# Altium PCB 环境检测.PcbDoc
Units mm, origin at the board's own origin, x right, y up, seen from the top; angles counter-clockwise.
Board outline 66.84 x 74.91 mm, 2 copper layers (Top Layer, Bottom Layer); 11 components, 42 nets, 80 pads, 43 vias.
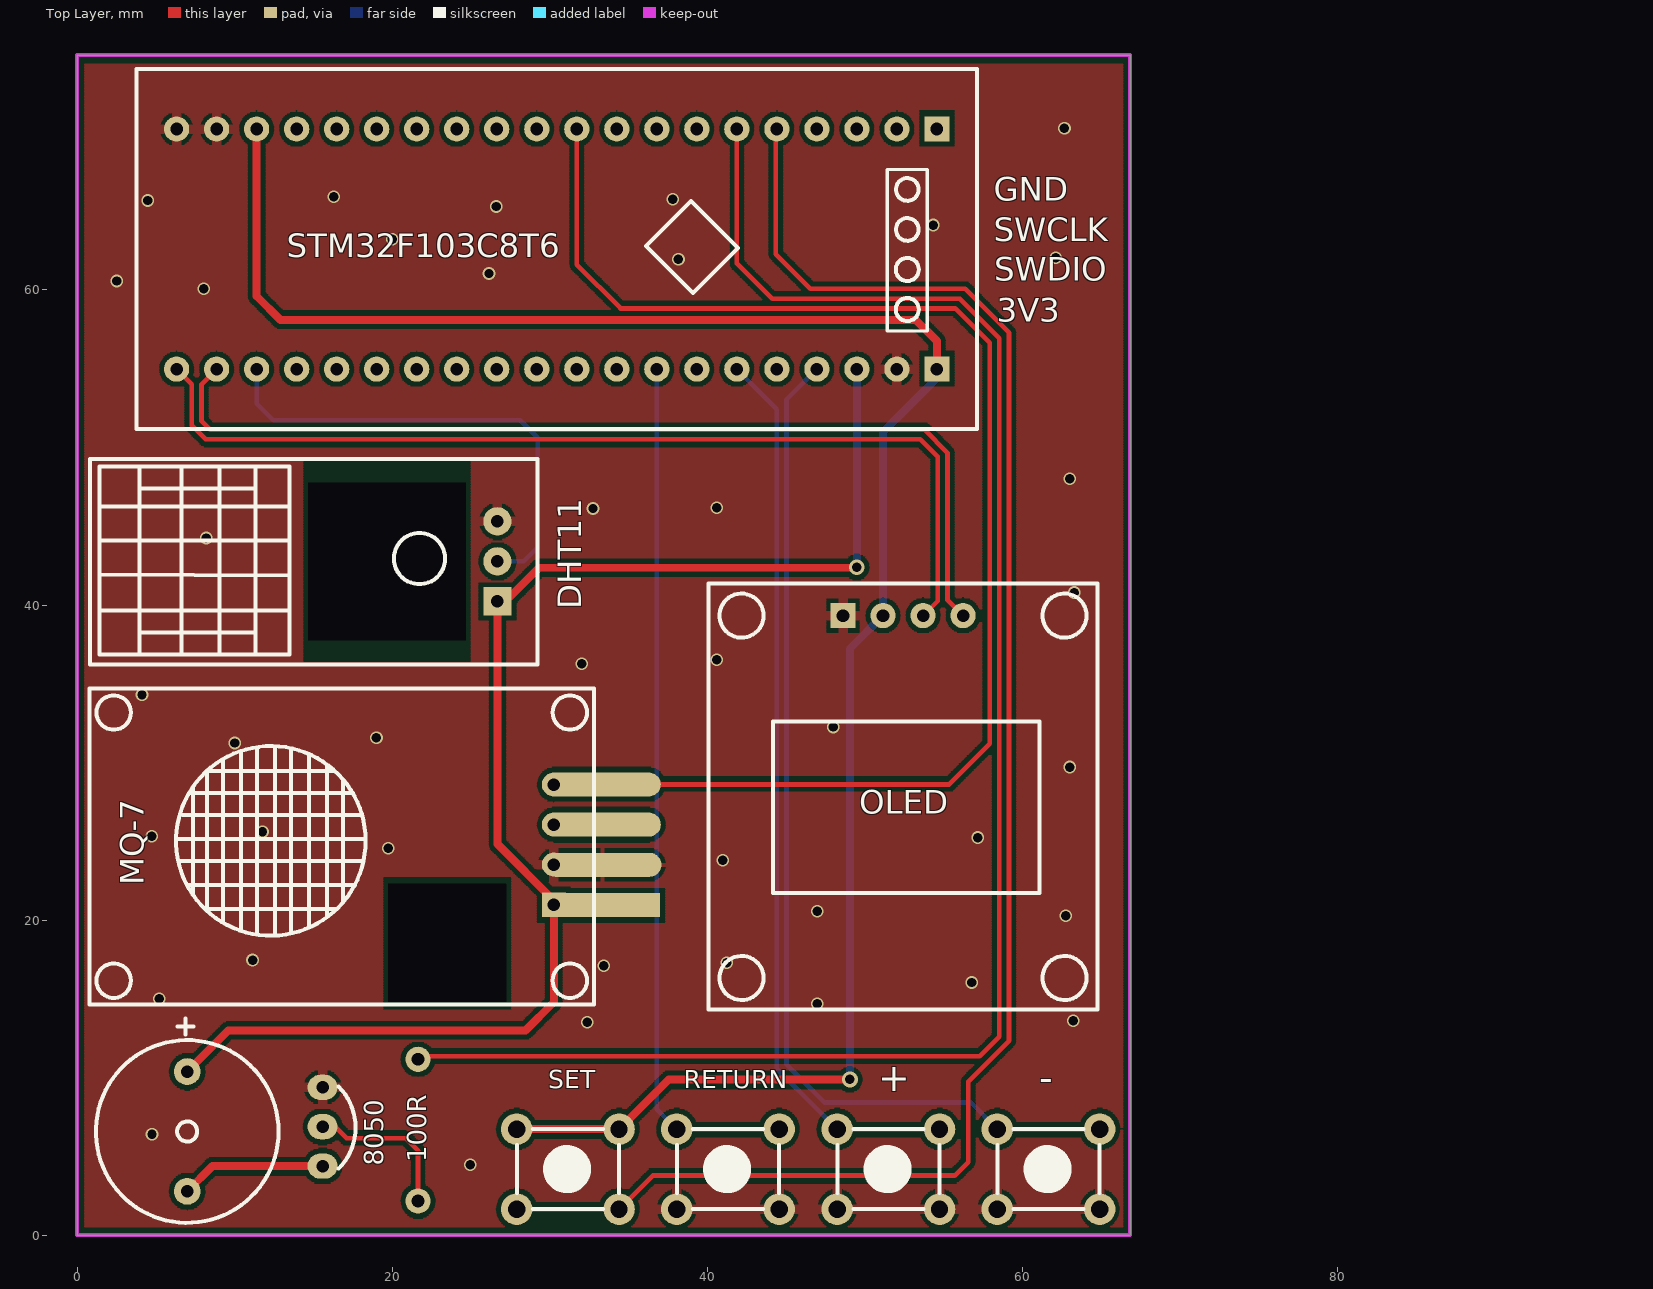
[diagram p0: Top Layer view]
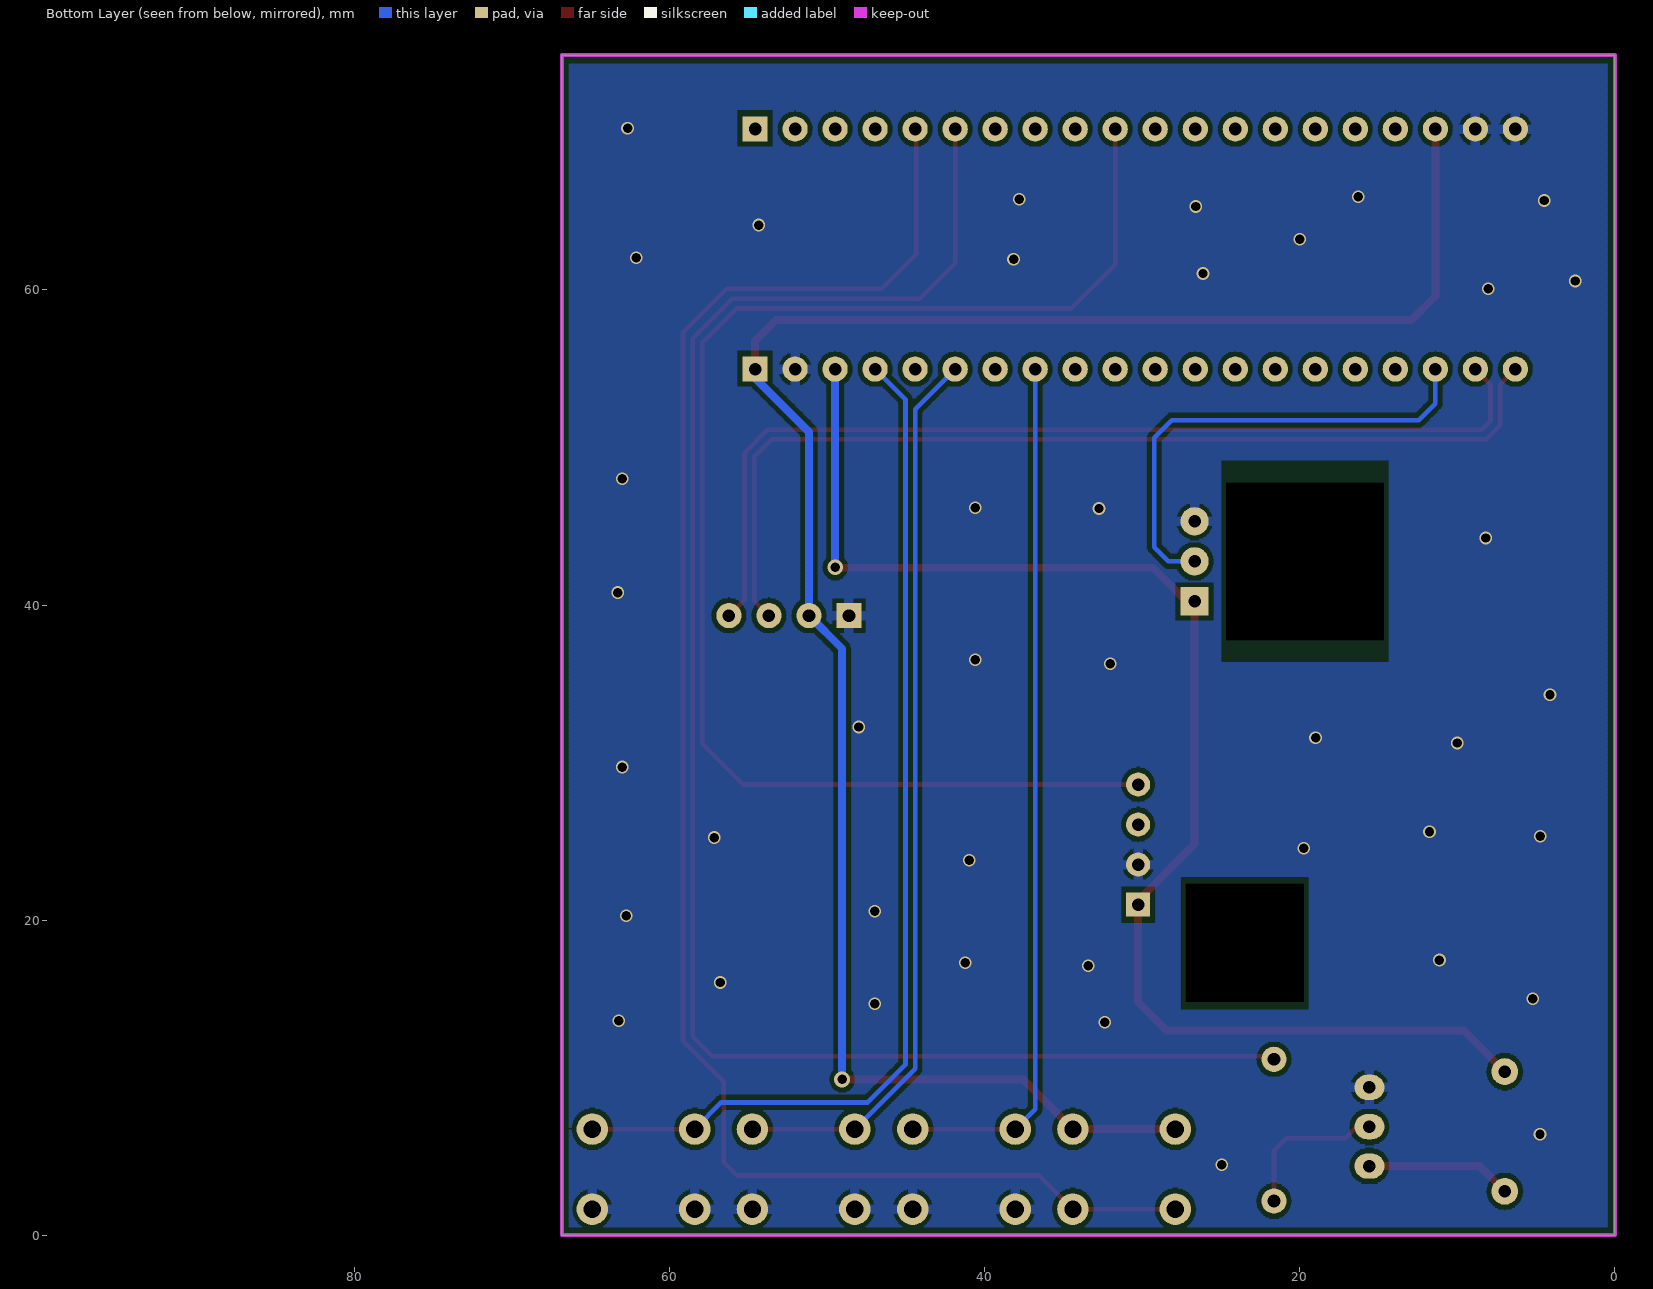
[diagram p1: Bottom Layer view, seen from below]

## Layer stack, top to bottom
Top Solder: solder mask 0.0102, Solder Resist, Dk 3.5
Top Layer: signal copper 0.0356
Dielectric1: dielectric 0.32, FR-4, Dk 4.8
Bottom Layer: signal copper 0.0356
Bottom Solder: solder mask 0.0102, Solder Resist, Dk 3.5

## Board outline
0,0 0,74.909 66.835,74.909 66.835,0

## Design rules (kind name [scope] priority, off if disabled: settings)
Clearance [All] p1: gap=0.3 ignorepadtopadclearanceinfootprint=FALSE
ComponentClearance [All] p1: gap=0 collisioncheckmode=3 verticalgap=0 showdistances=FALSE
DiffPairsRouting [All] p1: maxlimit=0.254 minlimit=0.25 mostfreqgap=0.254 toplayer_minwidth=0.3 toplayer_maxwidth=0.381 toplayer_prefwidth=0.3 bottomlayer_minwidth=0.3 bottomlayer_maxwidth=0.381 bottomlayer_prefwidth=0.3 maxuncoupledlength=12.7
FabricationTestpoint [(IsPad And (OnTopLayer Or OnBottomLayer))] p1: side=3 testpointundercomponent=TRUE minsize=1.016 maxsize=2.54 preferedsize=1.524 minholesize=0 maxholesize=1.016 preferedholesize=0.813 testpointgrid=0.025 allowsidetop=TRUE allowsidebottom=TRUE usegrid=TRUE gridtolerance=0
PolygonConnect [All] p1: thpad.connectstyle=Relief thpad.reliefconductorwidth=0.6 thpad.reliefentries=4 thpad.polygonreliefangle="90 Angle" thpad.airgapwidth=0.254 smdpad.connectstyle=Relief smdpad.reliefconductorwidth=0.254 smdpad.reliefentries=4 smdpad.polygonreliefangle="90 Angle" smdpad.airgapwidth=0.254 via.connectstyle=Direct via.reliefconductorwidth=0.254 via.reliefentries=4 via.polygonreliefangle="90 Angle" via.airgapwidth=0.254
RoutingVias [All] p1: holewidth=0.711 width=1.27 viastyle="Through Hole" minholewidth=0.711 minwidth=1.27 maxholewidth=0.711 maxwidth=1.27
SolderMaskExpansion [All] p1: expansion=0.102
Width GND [InNet('GND')] p1: maxlimit=1.524 minlimit=0.762 preferedwidth=0.762
Width POWER [InNet('5v')] p2: maxlimit=1.524 minlimit=0.3 preferedwidth=0.762
Width VCC [InNet('VCC3V3')] p3: maxlimit=1.524 minlimit=0.3 preferedwidth=0.762
Width [All] p4: maxlimit=1 minlimit=0.3 preferedwidth=0.5
27 further rules are at their usual default settings.

## Classes and differential pairs
component class 核心板和wifi智能家居: STM32F103C8T6
differential pair NewDifferentialPair1: +PB12 -PB13

## Components (designator, comment, footprint, x,y, rotation, side; value= is the part's Value field where it differs from the comment)
100R "Comment" PCBComponent_1 21.642,6.67 r270 top
8050 "A1015" A1015 15.584,6.888 r270 top (schematic designator AQ2)
+ "KEY_M" KEY_M 54.746,1.655 r180 top locked (schematic designator RESET)
- "KEY_M" KEY_M 64.906,1.655 r180 top locked (schematic designator RESET)
DHT11 "Comment" DHT11 26.682,42.773 r90 top locked
MQ-7 "Comment" MQ 15.803,27.411 r90 top locked
OLED "Comment" OLED 52.428,39.33 r0 top locked
RETURN "KEY_M" KEY_M 44.563,1.655 r180 top locked (schematic designator RESET)
SET "KEY_M" KEY_M 34.403,1.655 r180 top locked (schematic designator RESET)
STM32F103C8T6 "HEADER 20x2" "HEADER 20x2" 57.118,51.164 r180 top locked (schematic designator U1)
? "Comment" BELL 6.99,6.586 r270 top

## Footprints (in the part's own frame and the unit in brackets; to place one, negate y for a bottom-side part, rotate by r counter-clockwise, add the part's x,y. Pads: shape width x height; smd on the part's side, far side on the other; paste and mask are expansions set on the pad)
A1015 [mm]
  oval 1.6x1.9 hole 0.8: 1(-2.5,0) 2(0,0) 3(2.5,0)
  silkscreen extent -2.54,1.02 2.67,2.1
BELL [mm]
  round 1.7 hole 0.8: 1(3.8,0) 2(-3.8,0)
  silkscreen extent -7.16,-5.8 5.8,5.8
DHT11 [mm]
  rect 1.8x1.8 hole 0.8: 1(-2.54,0)
  rect 1.8x2.2 hole 10 square: 1(0,7)
  round 1.8 hole 0.8: 2(0,0) 3(2.54,0)
  silkscreen extent -6.55,-2.54 6.5,25.85
"HEADER 20x2" [mm]
  rect 1.6x1.6 hole 0.8: 1(2.54,-3.81) 21(2.54,-19.05)
  round 1.6 hole 0.8: 2(5.08,-3.81) 3(7.62,-3.81) 4(10.16,-3.81) 5(12.7,-3.81) 6(15.24,-3.81) 7(17.78,-3.81) 8(20.32,-3.81) 9(22.86,-3.81) 10(25.4,-3.81) 11(27.94,-3.81) 12(30.48,-3.81) 13(33.02,-3.81) 14(35.56,-3.81) 15(38.1,-3.81) 16(40.64,-3.81) 17(43.18,-3.81) 18(45.72,-3.81) 19(48.26,-3.81) 20(50.8,-3.81) 22(5.08,-19.05) 23(7.62,-19.05) 24(10.16,-19.05) 25(12.7,-19.05) 26(15.24,-19.05) 27(17.78,-19.05) 28(20.32,-19.05) 29(22.86,-19.05) 30(25.4,-19.05) 31(27.94,-19.05) 32(30.48,-19.05) 33(33.02,-19.05) 34(35.56,-19.05) 35(38.1,-19.05) 36(40.64,-19.05) 37(43.18,-19.05) 38(45.72,-19.05) 39(48.26,-19.05) 40(50.8,-19.05)
  silkscreen extent 0,-22.86 53.34,0
KEY_M [mm]
  round 2 hole 1.1: 1(0,0) 1(6.5,0) 2(0,-5.08) 2(6.5,-5.08)
  silkscreen extent 0,-5.08 6.48,0
MQ [mm]
  rect 1.524x7.5 smd: 1(-6.45,-17.45)
  rect 1.524x1.524 hole 0.8: 1(-6.425,-14.46)
  oval 1.524x7.5 smd: 2(-3.9,-17.55) 2(-1.35,-17.5) 2(1.2,-17.5)
  round 1.524 hole 0.8: 2(-3.885,-14.46) 3(-1.345,-14.46) 4(1.195,-14.46)
  round 1.6 hole 7.5 square unplated: 5(-8.85,-7.7)
  silkscreen extent -12.78,-17 7.29,15
OLED [mm]
  rect 1.6x1.6 hole 0.8: 1(-3.81,0)
  round 1.6 hole 0.8: 2(-1.27,0) 3(1.27,0) 4(3.81,0)
  silkscreen extent -12.35,-25 12.35,2.04
PCBComponent_1 [mm]
  round 1.6 hole 0.8: 1(-4.5,0) 2(4.5,0)

## Via types
v1: diameter 0.8, hole 0.6, Top Layer to Bottom Layer, tented both sides, 41 vias
v2: diameter 1, hole 0.6, Top Layer to Bottom Layer, tented both sides, 2 vias

## Nets (pads, with @x,y where several pads share a name; then routed paths per layer and width w, separated by ;. In a path a pad name is that pad's centre, name@x,y a point inside that pad or via, vN(x,y) a via of type N, cw(c..) or ccw(c..) an arc to the next point about the centre after c; other vN are vias at no path point)
5v: ?.2 DHT11.1@26.682,40.233 MQ-7.1 STM32F103C8T6.3 | length 88.3
  Top Layer w0.5: ?.2 9.594,12.99 28.465,12.99 30.263,14.788 30.263,20.986 30.263,21.25 26.682,24.831 26.682,40.233 27.193,40.233 29.327,42.367 v2@49.491,42.367
  Bottom Layer w0.5: v2@49.498,42.397 STM32F103C8T6.3
  other v2: 49.491,42.397
BELL-S8550: 8050.3 ?.1 | length 9.3
  Top Layer w0.5: ?.1 8.592,4.388 8050.3
GND: 8050.1 +.1 -.1 DHT11.3 MQ-7.2@30.263,23.526 MQ-7.2@33.353,23.511 OLED.1 RETURN.1 STM32F103C8T6.2 STM32F103C8T6.39 STM32F103C8T6.40
  other v1: 24.957,4.472 4.755,6.422 32.386,13.519 63.24,13.602 46.977,14.681 5.228,15.009 56.796,16.042 33.421,17.101 41.246,17.287 11.138,17.467 62.764,20.27 46.977,20.574 40.974,23.796 19.742,24.572 57.158,25.243 4.749,25.334 11.771,25.605 63.009,29.718 10.001,31.244 19.004,31.572 48.004,32.258 4.12,34.309 32.023,36.273 40.608,36.525 63.306,40.794 8.187,44.257 32.747,46.128 40.608,46.177 63.009,48.006 8.049,60.089 2.513,60.568 26.147,61.046 38.172,61.95 62.131,62.041 19.999,63.216 54.355,64.12 26.599,65.296 4.483,65.677 37.81,65.748 16.292,65.928 62.673,70.268
NetBELL_1: 
NetDS1_1: 
NetQ1_2: 
NRST: STM32F103C8T6.37
PA0: SET.1 STM32F103C8T6.25 | length 108.5
  Top Layer w0.3: SET.1@27.903,1.655 34.403,1.655 36.536,3.788 55.707,3.788 56.563,4.644 56.563,9.757 59.16,12.354 59.16,22.659 59.16,57.27 56.361,60.069 46.551,60.069 44.344,62.276 44.344,70.14 STM32F103C8T6.25
PA1: 100R.1 STM32F103C8T6.26 | length 109
  Top Layer w0.3: 100R.1 21.83,11.358 57.304,11.358 58.537,12.591 58.537,56.937 56.038,59.436 44.123,59.436 41.878,61.681 STM32F103C8T6.26
PA2: STM32F103C8T6.27
PA3: STM32F103C8T6.28
PA4: STM32F103C8T6.29
PA5: MQ-7.2@33.303,28.611 MQ-7.4 STM32F103C8T6.30 | length 91.1
  Top Layer w0.3: MQ-7.4 33.303,28.606 55.34,28.606 57.932,31.198 57.932,56.639 55.747,58.824 34.498,58.824 31.718,61.604 STM32F103C8T6.30
PA6: STM32F103C8T6.31
PA7: STM32F103C8T6.32
PA8: STM32F103C8T6.16
PA9: STM32F103C8T6.15
PA10: STM32F103C8T6.14
PA11: STM32F103C8T6.13
PA12: STM32F103C8T6.12
PA15: STM32F103C8T6.11
PB0: STM32F103C8T6.33
PB1: STM32F103C8T6.34
PB3: STM32F103C8T6.10
PB4: STM32F103C8T6.9
PB5: RETURN.2 STM32F103C8T6.8 | length 55.3
  Top Layer w0.3: RETURN.2@38.063,6.735 RETURN.2@44.563,6.735
  Bottom Layer w0.3: STM32F103C8T6.8 36.798,8 RETURN.2@38.063,6.735
PB6: STM32F103C8T6.7
PB7: STM32F103C8T6.5
PB8: +.2 STM32F103C8T6.6 | length 57.4
  Top Layer w0.3: +.2@48.246,6.735 +.2@54.746,6.735
  Bottom Layer w0.3: STM32F103C8T6.6 44.418,52.434 44.418,50.366 44.418,10.563 +.2@48.246,6.735
PB9: -.2 STM32F103C8T6.4 | length 66.5
  Top Layer w0.3: -.2@58.406,6.735 -.2@64.906,6.735
  Bottom Layer w0.3: STM32F103C8T6.4 45.035,53.051 45.035,10.816 47.422,8.429 56.712,8.429 -.2@58.406,6.735
PB10: STM32F103C8T6.35
PB11: STM32F103C8T6.36
PB12: OLED.3 STM32F103C8T6.20 | length 62.6
  Top Layer w0.3: STM32F103C8T6.20 7.279,54.013 7.279,51.399 8.158,50.52 53.528,50.52 54.625,49.423 54.625,40.257 OLED.3
PB13: OLED.4 STM32F103C8T6.19 | length 62.6
  Top Layer w0.3: STM32F103C8T6.19 7.902,54.018 7.902,51.665 8.446,51.121 53.796,51.121 55.245,49.672 55.245,40.323 OLED.4
PB14: DHT11.2 STM32F103C8T6.18 | length 30.8
  Bottom Layer w0.3: STM32F103C8T6.18 11.398,52.791 12.459,51.73 28.125,51.73 29.238,50.617 29.238,43.67 28.341,42.773 DHT11.2
PB15: STM32F103C8T6.17
PC13: STM32F103C8T6.22
PC14: STM32F103C8T6.23
PC15: STM32F103C8T6.24
R1K-S8550: 100R.2 8050.2 | length 9.9
  Top Layer w0.3: 8050.2 16.376,6.888 17.106,6.158 20.851,6.158 21.642,5.367 100R.2
VBAT: STM32F103C8T6.21
VCC3V3: OLED.2 SET.2 STM32F103C8T6.1 STM32F103C8T6.38 | length 126.6
  Top Layer w0.5: STM32F103C8T6.38 11.398,59.603 12.906,58.095 53.239,58.095 54.578,56.756 STM32F103C8T6.1 ; SET.2@27.903,6.735 34.403,6.735 37.555,9.887 v2(49.053,9.887)
  Bottom Layer w0.5: v2(49.053,9.887) 49.053,37.225 OLED.2 51.158,50.986 54.578,54.406 STM32F103C8T6.1
pads on no net: DHT11.1@19.682,42.773 MQ-7.2@33.303,26.061 MQ-7.3 MQ-7.5

## Polygon pours and split planes (outlines as drawn)
GND on Top Layer "GND_L01_P022" (hatched Horizontal grid 0.102 track 0.127, remove dead copper, pour order 22): 0,74.909 66.835,74.909 66.835,0 0,0
GND on Top Layer "GND_L01_P018" (solid, remove dead copper, pour order 18): 13.208,20.955
GND on Top Layer "GND_L01_P000" (solid, pour order 8): 97.028,99.187
GND on Bottom Layer "GND_L02_P024" (hatched Horizontal grid 0.102 track 0.127, remove dead copper, pour order 24): 0,74.909 66.835,74.909 66.835,0 0,0
GND on Bottom Layer "GND_L02_P004" (solid, pour order 9): 81.788,66.802

## Keep-outs
Keep-Out Layer:
  the board outline again, w0.254

## Other copper
Top Layer:
  pour cut-out: 97.613,9.212
  pour cut-out: 97.042,9.783

## Silkscreen, mask and mechanical layers (free items; w line width, h text height)
Top Overlay:
  circle w0.254: c52.698,58.759 r0.733
  circle w0.254: c52.698,61.299 r0.733
  circle w0.254: c52.698,63.839 r0.719
  circle w0.254: c52.698,66.379 r0.719
  lines w0.2: 51.428,57.387 51.428,67.649 53.968,67.649 53.968,57.387 51.428,57.387
  text "GND" at 58.198,65.647 h1.5
  text "SWCLK" at 58.198,63.107 h1.5
  text "SWDIO" at 58.208,60.587 h1.5
  text "3V3" at 58.391,57.979 h1.5
Mechanical 1:
  lines w0.254: 24.681,48.772 14.683,48.772 14.683,36.773 24.682,36.773 24.682,48.773 ; 27.252,14.712 27.252,22.41 19.754,22.41 19.754,14.711 27.253,14.711